# Altium PCB PowerPlane - 副本.PcbDoc
Units mm, origin at the board's own origin, x right, y up, seen from the top; angles counter-clockwise.
Board outline 140 x 96 mm, 2 copper layers (Top Layer, Bottom Layer); 114 components, 76 nets, 331 pads, 37 vias.
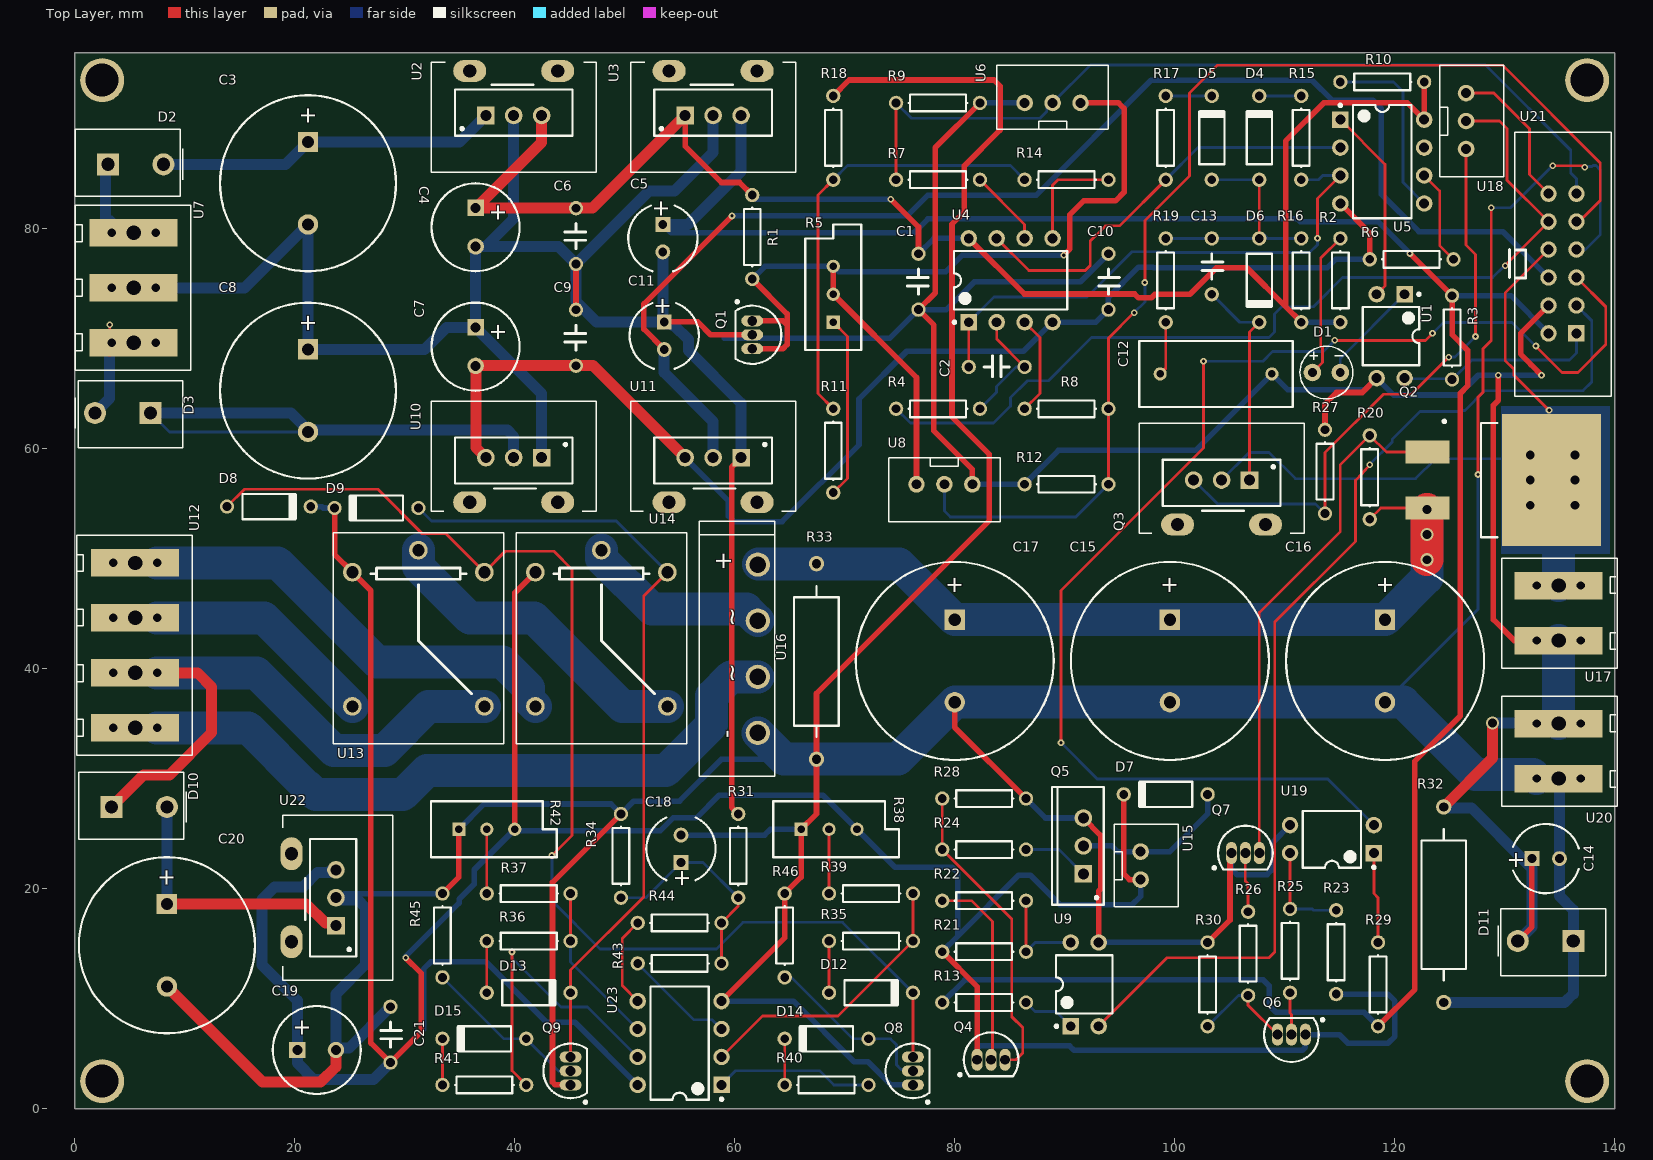
[diagram p0: Top Layer view]
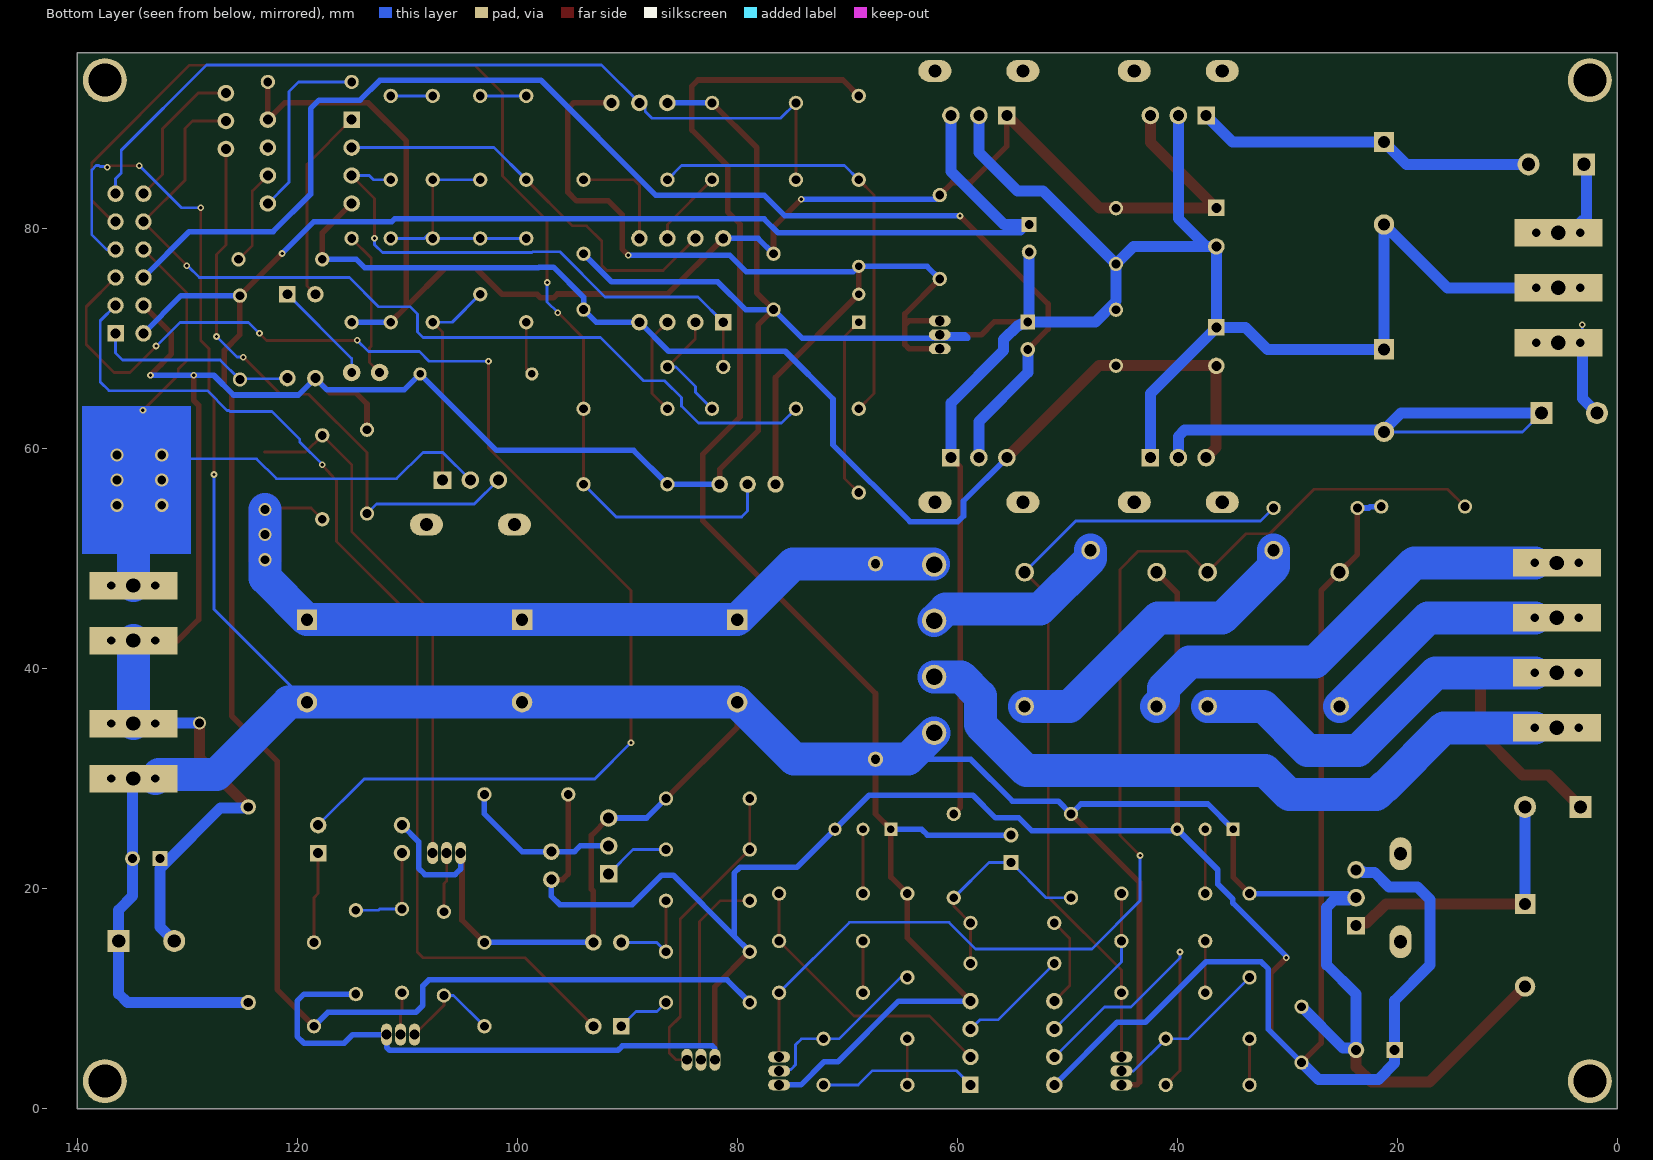
[diagram p1: Bottom Layer view, seen from below]

## Layer stack, top to bottom
Top Solder: solder mask 0.0102, Solder Resist, Dk 3.5
Top Layer: signal copper 0.0356
Dielectric 1: dielectric 0.32, FR-4, Dk 4.8
Bottom Layer: signal copper 0.0356
Bottom Solder: solder mask 0.0102, Solder Resist, Dk 3.5

## Board outline
0,0 0,96 140,96 140,0

## Design rules (kind name [scope] priority, off if disabled: settings)
Clearance Clearance_1 [WithinRoom('RoomDefinition1') or WithinRoom('RoomDefinition2') or  WithinRoom('RoomDefinition3') or  WithinRoom('RoomDefinition4') or  WithinRoom('RoomDefinition5') or  WithinRoom('RoomDefinition6') vs WithinRoom('RoomDefinition1') or WithinRoom('RoomDefinition2') or  WithinRoom('RoomDefinition3') or  WithinRoom('RoomDefinition4') or  WithinRoom('RoomDefinition5') or  WithinRoom('RoomDefinition6')] p1: gap=0.2 ignorepadtopadclearanceinfootprint=TRUE
Clearance [Not (  WithinRoom('RoomDefinition1') or WithinRoom('RoomDefinition2') or  WithinRoom('RoomDefinition3') or  WithinRoom('RoomDefinition4') or  WithinRoom('RoomDefinition5') or  WithinRoom('RoomDefinition6') ) vs Not (  WithinRoom('RoomDefinition1') or WithinRoom('RoomDefinition2') or  WithinRoom('RoomDefinition3') or  WithinRoom('RoomDefinition4') or  WithinRoom('RoomDefinition5') or  WithinRoom('RoomDefinition6') )] p2: gap=0.508 ignorepadtopadclearanceinfootprint=TRUE except(1.016: Track-Track)
ComponentClearance [All] p1: gap=0.254 collisioncheckmode=3 verticalgap=0.254 showdistances=FALSE checkcomponentboundary=TRUE
Height [All] p1: minheight=0 maxheight=50.4 prefheight=12.7
HoleSize [All] p1: absolutevalues=TRUE maxlimit=3 minlimit=0.025 maxpercent=80.000 minpercent=20.000
MinimumSolderMaskSliver MinimumSolderMaskSliver_2 [HasFootprint('TO-226-AA') vs HasFootprint('TO-226-AA')] p1: minsoldermaskwidth=0.06
MinimumSolderMaskSliver MinimumSolderMaskSliver_1 [HasFootprint('TO-92A') vs HasFootprint('TO-92A')] p2: minsoldermaskwidth=0.06
MinimumSolderMaskSliver [All] p3: minsoldermaskwidth=0.254
PolygonConnect [All] p1: connectstyle=Relief reliefconductorwidth=0.254 reliefentries=4 polygonreliefangle="90 Angle" airgapwidth=0.254
RoomDefinition RoomDefinition6 [False] p1: confinementstyle=ConfineIn formatcopy=TRUE lockcomponents=FALSE outline 107.588,6.731 ccw(c110.617,6.731) 110.617,3.702 ccw(c110.617,6.731) 113.646,6.731 ccw(c110.617,6.731) 110.617,9.76 ccw(c110.617,6.731)
RoomDefinition RoomDefinition5 [False] p2: confinementstyle=ConfineIn formatcopy=TRUE lockcomponents=FALSE outline 103.114,23.241 ccw(c106.426,23.241) 106.426,19.929 ccw(c106.426,23.241) 109.738,23.241 ccw(c106.426,23.241) 106.426,26.553 ccw(c106.426,23.241)
RoomDefinition RoomDefinition4 [False] p3: confinementstyle=ConfineIn formatcopy=TRUE lockcomponents=FALSE outline 79.629,4.445 ccw(c83.312,4.445) 83.312,0.762 ccw(c83.312,4.445) 86.995,4.445 ccw(c83.312,4.445) 83.312,8.128 ccw(c83.312,4.445)
RoomDefinition RoomDefinition3 [False] p4: confinementstyle=ConfineIn formatcopy=TRUE lockcomponents=FALSE outline 73.025,3.429 ccw(c76.2,3.429) 76.2,0.254 ccw(c76.2,3.429) 79.375,3.429 ccw(c76.2,3.429) 76.2,6.604 ccw(c76.2,3.429)
RoomDefinition RoomDefinition2 [False] p5: confinementstyle=ConfineIn formatcopy=TRUE lockcomponents=FALSE outline 41.547,3.429 ccw(c45.085,3.429) 45.085,-0.109 ccw(c45.085,3.429) 48.623,3.429 ccw(c45.085,3.429) 45.085,6.967 ccw(c45.085,3.429)
RoomDefinition RoomDefinition1 [False] p6: confinementstyle=ConfineIn formatcopy=TRUE lockcomponents=FALSE outline 61.595,66.761 cw(c61.595,70.358) 57.998,70.358 cw(c61.595,70.358) 61.595,73.955 cw(c61.595,70.358) 65.192,70.358 cw(c61.595,70.358)
RoutingVias [All] p1: holewidth=0.305 width=0.61 viastyle="Through Hole" minholewidth=0.305 minwidth=0.61 maxholewidth=1.2 maxwidth=0.85
SilkToSolderMaskClearance SilkToSolderMaskClearance_2 [HasFootprint('TO-226-AA') vs HasFootprint('TO-226-AA')] p1: minsilkscreentomaskgap=0.254 clearancetoexposedcopper=TRUE
SilkToSolderMaskClearance SilkToSolderMaskClearance_1 [HasFootprint('TO-92A') vs HasFootprint('TO-92A')] p2: minsilkscreentomaskgap=0.06 clearancetoexposedcopper=TRUE
SilkToSolderMaskClearance [IsPad] p3: minsilkscreentomaskgap=0.254 clearancetoexposedcopper=TRUE
SolderMaskExpansion [All] p1: expansion=0.102 istentingtop=FALSE
SupplyNets "Schematic Supply Nets_1" [InNet('GND')] p1: voltage=0.000
SupplyNets "Schematic Supply Nets" [InNet('+12')] p2: voltage=0.000
Width Width_1 [InNetClass('Power')] p1: maxlimit=3 minlimit=0.254 preferedwidth=0.508
Width [All] p2: maxlimit=3 minlimit=0.254 preferedwidth=0.254
25 further rules are at their usual default settings.

## Classes and differential pairs
net class Power: +2.5V_H +5V_H +12 +12V_H -5V_H -12V_H GND GND_H

## Components (designator, comment, footprint, x,y, rotation, side; value= is the part's Value field where it differs from the comment)
C1 "" RAD-0.2 76.708,75.184 r90 top value=104
C2 "BBC" RAD-0.2 83.82,67.437 r0 top value=471
C3 "35V" CAPPR7.5-16x25 21.209,84.137 r270 top value=3300uF
C4 "25V" CAPPR5-8x12 36.449,80.137 r270 top value=470uF
C5 "16V" CAPPR5-6.3x11 53.467,79.14 r270 top value=220uF
C6 "" RAD-0.2 45.571,79.329 r90 top value=104
C7 "25V" CAPPR5-8x12 36.449,69.278 r270 top value=470uF
C8 "35V" CAPPR7.5-16x25 21.209,65.278 r270 top value=3300uF
C9 "" RAD-0.2 45.571,70.086 r90 top value=104
C10 "" RAD-0.2 93.98,75.184 r270 top value=104
C11 "16V" CAPPR5-6.3x11 53.594,70.275 r270 top value=220uF
C12 "BBC" RAD-0.4-BBC 103.759,66.802 r0 top value=153
C13 "BBC" RAD-0.2 103.378,76.581 r270 top value=471
C14 "50V" CAPPR5-6.3x11 133.731,22.733 r0 top value=100uF
C15 "63V" CAPPR7.5-18x35.5 99.568,40.7 r270 top value=2200uF
C16 "63V" CAPPR7.5-18x35.5 119.126,40.7 r270 top value=2200uF
C17 "63V" CAPPR7.5-18x35.5 80.01,40.7 r270 top value=2200uF
C18 "50V" CAPPR5-6.3x15 55.118,23.622 r90 top value=47uF
C19 "25V" CAPPR5-8x12 21.999,5.334 r0 top value=470uF
C20 "35V" CAPPR7.5-16x25 8.382,14.859 r270 top value=3300uF
C21 "" RAD-0.2 28.702,6.731 r270 top value=104
D1 "CC" LED 113.792,66.929 r90 top
D2 "1N5408" DIO18.84-9.6x5.6-Vetical 5.016,85.852 r0 top
D3 "1N5408" DIO18.84-9.6x5.6-Vetical 4.889,63.246 r180 top
D4 "1N4007" DO-41 107.696,88.265 r90 top
D5 "1N4007" DO-41 103.378,88.265 r90 top
D6 "1N4007" DO-41 107.696,75.311 r270 top
D7 "1N4007" DO-41 99.187,28.575 r180 top
D8 "1N4007" DO-41 17.653,54.737 r0 top
D9 "1N4007" DO-41 27.432,54.61 r180 top
D10 "1N5408" DIO18.84-9.6x5.6-Vetical 5.334,27.432 r0 top
D11 "1N5408" DIO18.84-9.6x5.6-Vetical 134.239,15.24 r180 top
D12 "1N4007" DO-41 72.39,10.541 r0 top
D13 "1N4007" DO-41 41.275,10.541 r0 top
D14 "1N4728" DO-41 68.353,6.35 r180 top
D15 "1N4728" DO-41 37.238,6.35 r180 top
Q1 "TL431" TO-226-AA 61.595,70.358 r180 top
Q2 "F4905S" D2-PAK 130.739,57.15 r0 top
Q3 "TIP41" "TO-220AB - HEATSINK" 104.267,57.15 r180 top
Q4 "S8550" TO-92A 83.312,4.445 r270 top
Q5 "TIP41" TO-220AB 91.694,23.887 r90 top
Q6 "S8550" TO-92A 110.617,6.731 r90 top
Q7 "2N5551" TO-92A 106.426,23.241 r270 top
Q8 "S8050" TO-92A 76.2,3.429 r0 top
Q9 "S8050" TO-92A 45.085,3.429 r0 top
R1 "" AXIAL-0.3 61.595,79.248 r270 top value=2.7K
R2 "" AXIAL-0.3 115.062,75.311 r90 top value=2K
R3 "" AXIAL-0.3 125.222,70.104 r270 top value=10K
R4 "" AXIAL-0.3 78.486,63.627 r180 top value=100R
R5 "" VR5 68.961,74.041 r90 top value=5K
R6 "" AXIAL-0.3 121.539,77.216 r180 top value=10K
R7 "" AXIAL-0.3 78.486,84.455 r0 top value=100R
R8 "" AXIAL-0.3 90.17,63.627 r0 top value=100R
R9 "" AXIAL-0.3 78.486,91.44 r0 top value=1M
R10 "" AXIAL-0.3 118.872,93.345 r0 top value=10K
R11 "" AXIAL-0.3 68.961,59.817 r90 top value=6.8K
R12 "" AXIAL-0.3 90.17,56.769 r180 top value=1M
R13 "" AXIAL-0.3 82.677,9.652 r0 top value=1k
R14 "" AXIAL-0.3 90.17,84.455 r180 top value=100R
R15 "" AXIAL-0.3 111.506,88.265 r90 top value=100R
R16 "" AXIAL-0.3 111.506,75.311 r90 top value=3K
R17 "" AXIAL-0.3 99.187,88.265 r90 top value=100R
R18 "" AXIAL-0.3 68.961,88.265 r90 top value=100K
R19 "" AXIAL-0.3 99.187,75.311 r270 top value=33K
R20 "" AXIAL-0.3 117.729,57.404 r90 top value=10K
R21 "" AXIAL-0.3 82.677,14.273 r180 top value=10K
R22 "" AXIAL-0.3 82.677,18.909 r180 top value=4.7K
R23 "" AXIAL-0.3 114.681,14.224 r270 top value=10K
R24 "" AXIAL-0.3 82.677,23.558 r0 top value=2K
R25 "" AXIAL-0.3 110.49,14.351 r270 top value=4.7K
R26 "" AXIAL-0.3 106.68,14.097 r270 top value=2K
R27 "" AXIAL-0.3 113.665,57.912 r270 top value=1K
R28 "" AXIAL-0.3 82.677,28.194 r0 top value=10K
R29 "" AXIAL-0.3 118.491,11.303 r90 top value=1k
R30 "" AXIAL-0.3 102.997,11.303 r90 top value=10K
R31 "" AXIAL-0.3 60.325,22.987 r90 top value=10K
R32 "2W" AXIAL-0.7 124.46,18.542 r90 top value=4.3K
R33 "2W" AXIAL-0.7 67.437,40.66 r90 top value=4.3K
R34 "" AXIAL-0.3 49.657,22.987 r270 top value=10K
R35 "" AXIAL-0.3 72.39,15.24 r0 top value=56K
R36 "" AXIAL-0.3 41.275,15.24 r0 top value=100K
R37 "" AXIAL-0.3 41.275,19.558 r180 top value=10K
R38 "" VR5 68.58,25.4 r0 top value=10K
R39 "" AXIAL-0.3 72.39,19.558 r180 top value=10K
R40 "" AXIAL-0.3 68.353,2.159 r0 top value=2.7K
R41 "" AXIAL-0.3 37.238,2.159 r0 top value=2.7K
R42 "" VR5 37.465,25.4 r0 top value=10K
R43 "" AXIAL-0.3 54.991,13.208 r0 top value=100R
R44 "" AXIAL-0.3 54.991,16.891 r180 top value=100R
R45 "" AXIAL-0.3 33.428,15.748 r90 top value=10K
R46 "" AXIAL-0.3 64.543,15.748 r90 top value=10K
U1 "EL817C" PC817 120.904,74.041 r270 top
U2 "L7812" "TO-220AB - HEATSINK" 39.913,90.297 r0 top
U3 "L7805" "TO-220AB - HEATSINK" 58.039,90.297 r0 top
U4 "TL082" DIP-8 85.09,75.311 r90 top
U5 "LM393" DIP-8 118.872,86.106 r0 top
U6 "POT-3P" X254-3P 88.9,91.44 r180 top
U7 "POWER3" KF128-50-3P 5.363,74.629 r90 top
U8 "POT-3P" X254-3P 79.068,56.769 r0 top
U9 "EL817C" PC817 90.551,7.493 r90 top
U10 "L7912" "TO-220AB - HEATSINK" 39.913,59.182 r180 top
U11 "L7905" "TO-220AB - HEATSINK" 58.039,59.182 r180 top
U12 "POWER4" KF128-50-4P 5.493,42.118 r90 top
U13 "SDR12VDCSLC" SDR12VDCSLC 31.242,42.672 r0 top
U14 "SDR12VDCSLC" SDR12VDCSLC 47.879,42.672 r0 top
U15 "FAN" X254-2P 96.901,22.098 r90 top
U16 "KBU1010" KBU1010 62.103,34.163 r90 top
U17 "POWER2" KF128-50-2P 134.915,45.061 r270 top
U18 "REG3" X254-3P 126.492,89.789 r90 top
U19 "EL817C" PC817 118.11,23.241 r180 top
U20 "POWER2" KF128-50-2P 134.915,32.512 r270 top
U21 "DC3-12P" DC3-12P 136.532,70.485 r90 top
U22 "L7812" "TO-220AB - HEATSINK" 23.749,19.177 r90 top
U23 "LM358" DIP-8 54.991,5.969 r180 top

## Footprints (in the part's own frame and the unit in brackets; to place one, negate y for a bottom-side part, rotate by r counter-clockwise, add the part's x,y. Pads: shape width x height; smd on the part's side, far side on the other; paste and mask are expansions set on the pad)
AXIAL-0.3 [mm] "Axial Device, Thru-Hole; 2 Leads; 0.3 in Pin Spacing"
  round 1.3 hole 0.8: 1(-3.81,0) 2(3.81,0)
  silkscreen extent -2.67,-0.76 2.67,0.76, body extent -2.85,-1.16 2.85,1.14, height 2.45
AXIAL-0.7 [mm] "Axial Device, Thru-Hole; 2 Leads; 0.7 in Pin Spacing"
  round 1.4 hole 0.85: 1(-8.89,0) 2(8.89,0)
  silkscreen extent -6.86,-2.03 6.86,2.03, body extent -7.35,-2.41 7.35,2.39, height 4.9
CAPPR5-6.3x11 [mm] "Capacitor, Electrolytic, Radial; Body 6.3 x 11 mm (Dia.xH typ); Pin Spacing 5 mm (typ)"
  rect 1.35x1.35 hole 0.8: 1(-1.25,0)
  round 1.35 hole 0.8: 2(1.25,0)
  silkscreen extent -2.96,-3.15 3,3.15, body extent -3,-3 3,3, height 11
CAPPR5-6.3x15 [mm] "Capacitor, Electrolytic, Radial; Body 6.3 x 15 mm (Dia.xH typ); Pin Spacing 5 mm (typ)"
  rect 1.35x1.35 hole 0.8: 1(-1.25,0)
  round 1.35 hole 0.8: 2(1.25,0)
  silkscreen extent -2.85,-3.15 2.85,3.15, body extent -3,-3 3,3, height 13
CAPPR5-8x12 [mm] "Capacitor, Electrolytic, Radial; Body 8 x 12 mm (Dia.xH typ); Pin Spacing 5 mm (typ)"
  rect 1.5x1.5 hole 0.9: 1(-1.75,0)
  round 1.5 hole 0.9: 2(1.75,0)
  silkscreen extent -4,-4 4,4, body extent -4,-4 4,4, height 12
CAPPR7.5-16x25 [mm] "Capacitor, Electrolytic, Radial; Body 16 x 25 mm (Dia.xH typ); Pin Spacing 7.5 mm (typ)"
  rect 1.85x1.85 hole 1.1: 1(-3.75,0)
  round 1.85 hole 1.1: 2(3.75,0)
  silkscreen extent -8,-8 8,8, body extent -8,-8 8,8, height 25
CAPPR7.5-18x35.5 [mm] "Capacitor, Electrolytic, Radial; Body 18 x 35.5 mm (Dia.xH typ); Pin Spacing 7.5 mm (typ)"
  rect 1.85x1.85 hole 1.1: 1(-3.75,0)
  round 1.85 hole 1.1: 2(3.75,0)
  silkscreen extent -9,-9 9,9, body extent -9,-9 9,9, height 35.5
D2-PAK [mm] "D2-PAK, 4-Leads, Body 9.2x10.2mm, Pitch 2.54mm, Lead Span 15.4mm, IPC High Density"
  rect 4x2.1 smd: 1(-7.74,2.54) 3(-7.74,-2.54)
  rect 9x12 smd: 2(3.5,0)
  silkscreen extent -6.35,-5.2 -1.4,5.46, body extent -2.9,-5.2 6.5,5.2, height 4.6
DC3-12P [mm] "Connector; Header; 6x2 Position"
  rect 1.5x1.5 hole 0.9: 1(0,0)
  round 1.5 hole 0.9: 2(2.54,0) 3(5.08,0) 4(7.62,0) 5(10.16,0) 6(12.7,0) 7(12.7,2.54) 8(10.16,2.54) 9(7.62,2.54) 10(5.08,2.54) 11(2.54,2.54) 12(0,2.54)
  silkscreen extent -5.71,-3.18 18.29,6.1
DIO18.84-9.6x5.6-Vetical [mm] "Diode, Axial; Body 9.5 x 5.6 mm (LxDia. max), Lead Dia. 1.32 mm (max)"
  rect 2x2 hole 1.2: 1(-2,0)
  round 2 hole 1.2: 2(3.048,0)
  silkscreen extent -4.95,-2.92 4.83,3.17, body extent -4.9,-2.95 1.09,3.05, height 10
DIP-8 [mm] "DIP; 8 Leads; Row Spacing 7.62 mm; Pitch 2.54 mm"
  rect 1.5x1.5 hole 0.9: 1(-3.81,3.81)
  round 1.5 hole 0.9: 2(-3.81,1.27) 3(-3.81,-1.27) 4(-3.81,-3.81) 5(3.81,-3.81) 6(3.81,-1.27) 7(3.81,1.27) 8(3.81,3.81)
  silkscreen extent -3.93,-5.15 2.65,5.23, body extent -3.6,-5.15 3.6,5.15, height 5.08
DO-41 [mm] "Diode, Axial; Body 5.2 x 2.7 mm (LxDia. max), Lead Dia. 0.86 mm (max)"
  round 1.3 hole 0.8: 1(-3.81,0) 2(3.81,0)
  silkscreen extent -2.41,-1.14 2.54,1.14, body extent -2.46,-1.23 2.54,1.27, height 2.55
KBU1010 [mm]
  round 2.2 hole 1.5: 1(0,0) 2(5.1,0) 3(10.2,0) 4(15.3,0)
  silkscreen extent -3.95,-1.52 19.25,5.33, body extent -3.94,-1.52 19.18,5.33, height 19.3
KF128-50-2P [mm] "KF128-50-2P"
  round 1.524 hole 0.762 mask+0: 1(-2.5,2) 1(-2.5,-2) 2(2.5,2) 2(2.5,-2)
  rect 2.5x8 hole 1.3: 1(-2.5,0) 2(2.5,0)
  silkscreen extent -5,-5.2 5,5.3, body extent -4.95,-5.21 4.95,5.33, height 14
KF128-50-3P [mm] "KF128-50-3P"
  round 1.524 hole 0.762 mask+0: 1(5,-2) 1(5,2) 2(0,2) 2(0,-2) 3(-5,-2) 3(-5,2)
  rect 2.5x8 hole 1.3: 1(5,0) 2(0,0) 3(-5,0)
  silkscreen extent -7.5,-5.2 7.5,5.3, body extent -7.49,-5.21 7.49,5.33, height 7
KF128-50-4P [mm] "KF128-50-4P"
  round 1.524 hole 0.762 mask+0: 1(7.5,-2) 1(7.5,2) 2(2.5,-2) 2(2.5,2) 3(-2.5,-2) 3(-2.5,2) 4(-7.5,-2) 4(-7.5,2)
  rect 2.5x8 hole 1.3: 1(7.5,0) 2(2.5,0) 3(-2.5,0) 4(-7.5,0)
  silkscreen extent -10,-5.2 10,5.3, body extent -10.03,-5.21 10.03,5.33, height 7
LED [mm] "LED; 2 Leads"
  round 1.6 hole 0.8: 1(0,1.27) 2(0,-1.27)
  silkscreen extent -2.4,-2.4 2.4,2.4
PC817 [mm] "PC817"
  rect 1.5x1.5 hole 0.9: 1(0,0)
  round 1.5 hole 0.9: 2(0,-2.54) 3(7.62,-2.54) 4(7.62,0)
  silkscreen extent -0.12,-3.81 6.46,1.43, body extent 0.21,-3.81 7.41,1.34, height 5.08
RAD-0.2 [mm] "Radial Cap, Thru-Hole; 2 Leads; 0.2 in Pin Spacing"
  round 1.3 hole 0.8: 1(-2.54,0) 2(2.54,0)
  silkscreen extent -1.14,-0.89 1.14,1.02, body extent -2.54,-1.91 2.54,2.03, height 6
RAD-0.4-BBC [mm] "Radial Cap, Thru-Hole; 2 Leads; 0.4 in Pin Spacing"
  round 1.2 hole 0.7: 1(-5.08,0) 2(5.08,0)
  silkscreen extent -6.98,-3 6.98,3
SDR12VDCSLC [mm] "SDR12VDCSLC"
  round 1.7 hole 1.1: 1(-6,6.1) 2(0,8.1) 3(6,6.1) 4(6,-6.1) 5(-6,-6.1)
  silkscreen extent -7.75,-9.5 7.75,9.7, body extent -7.75,-9.53 7.75,9.65, height 15.8
TO-92A [mm] "TO, Flat Index; 3 In-Line, Axial Leads; Body Dia. 4.5mm; Leads 0.51 x 0.48 mm (max)"
  oval 2x1 hole 0.9: 1(0,1.27) 2(0,0) 3(0,-1.27)
  silkscreen extent -2.48,-2.95 1.5,2.48, body extent -2.48,-2.5 1.5,2.5, height 6.86
TO-220AB [mm] "TO, Thru-Hole, Vertical, Heatsink Mounted; 3 In-Line Leads; Pitch 2.54 mm"
  rect 1.6x1.6 hole 1: 1(-2.54,0)
  round 1.6 hole 1: 2(0,0) 3(2.54,0)
  silkscreen extent -5.35,-1.85 5.35,2.85, body extent -5.4,-1.9 5.4,2.9, height 19.3
"TO-220AB - HEATSINK" [mm] "TO, Thru-Hole, Vertical, Heatsink Mounted; 3 In-Line Leads; Pitch 2.54 mm, with heat sink."
  oval 3x2 hole 1.2: 0(-4,4.05) 0(4,4.05)
  rect 1.6x1.6 hole 1: 1(-2.54,0)
  round 1.6 hole 1: 2(0,0) 3(2.54,0)
  silkscreen extent -7.5,-5.15 7.5,4.85, body extent -7.49,-5.08 7.49,4.83, height 20
TO-226-AA [mm] "TO, Flat Index; 3 In-Line, Axial Leads; Body Dia. 4.8mm; Leads 0.55 x 0.51 mm (max)"
  oval 2x1 hole 0.9: 1(0,-1.27) 2(0,0) 3(0,1.27)
  silkscreen extent -2.65,-3.13 1.52,2.65, body extent -2.65,-2.66 1.52,2.66, height 5.33
VR5 [mm] "Thru-Hole; 3 Leads"
  round 1.2 hole 0.7: 1(2.54,0) 3(0,0)
  rect 1.2x1.2 hole 0.7: 2(-2.54,0)
  silkscreen extent -5.08,-2.54 6.35,2.54, body extent -4.95,-2.29 4.95,2.29, height 10
X254-2P [mm] "X254-2P"
  oval 1.5x1.524 hole 0.9: 1(-1.27,0) 2(1.27,0)
  silkscreen extent -3.75,-3.43 3.75,2.41, body extent -3.68,-3.43 3.68,2.29, height 7
X254-3P [mm] "X254-3P"
  oval 1.5x1.524 hole 0.9: 1(-2.54,0) 2(0,0) 3(2.54,0)
  silkscreen extent -5.08,-3.43 5.08,2.41, body extent -5.08,-3.43 5.08,2.29, height 7

## Part data
C1 C2 C6 C9 C10 C12 C13 C21: library part Cap, "Capacitor", LatestRevisionDate=17-Jul-2002, LatestRevisionNote="Re-released for DXP Platform.", PackageDescription="Radial Cap, Thru-Hole; 2 Leads; 0.3 in Pin Spacing", PackageReference=RAD-0.3, Published=8-Jun-2000, Publisher="Altium Limited"
C3: library part "Cap Pol1", "Polarized Capacitor (Radial),16x25", LatestRevisionDate=17-Jul-2002, LatestRevisionNote="Re-released for DXP Platform.", PackageDescription="Polarized Capacitor (Radial); 2 Leads", PackageReference=RB7.6-15, Published=8-Jun-2000, Publisher="Altium Limited"
C4 C5 C7 C8 C11 C14 C15 C16 C17 C18 C19 C20: library part "Cap Pol1", "Polarized Capacitor (Radial)", LatestRevisionDate=17-Jul-2002, LatestRevisionNote="Re-released for DXP Platform.", PackageDescription="Polarized Capacitor (Radial); 2 Leads", PackageReference=RB7.6-15, Published=8-Jun-2000, Publisher="Altium Limited"
D1: library part LED1, "Typical RED GaAs LED", LatestRevisionDate=08-Jul-2005, LatestRevisionNote="Mech Layer 1 removed.", PackageDescription="LED; 2 Leads", PackageReference=LED-1, Published=8-Jun-2000, Publisher="Altium Limited"
D2 D3 D4 D5 D6 D7 D8 D9 D10 D11 D12 D13: library part "Diode 1N4007", "1 Amp General Purpose Rectifier", Code_JEDEC=DO-204-AL, ComponentLink1Description="Manufacturer Link", ComponentLink1URL=http://www.fairchildsemi.com/, ComponentLink2Description=Datasheet, ComponentLink2URL=http://www.fairchildsemi.com/ds/1N%2F1N4001.pdf, DatasheetVersion=1998, LatestRevisionDate=17-Jul-2002, LatestRevisionNote="Re-released for DXP Platform.", PackageDescription="Diode, Axial; Body 5.2 x 2.7 mm (LxDia. max), Lead Dia. 0.86 mm (max)", PackageReference=DO-41, PackageVersion=Aug-1999, Published=8-Jun-2000, Publisher="Altium Limited"
D14 D15: library part "D Zener", "Zener Diode", LatestRevisionDate=17-Jul-2002, LatestRevisionNote="Re-released for DXP Platform.", PackageDescription="Diode, Thru-Hole; 2 Leads; 0.7 in Pin Spacing", PackageReference=DIODE-0.7, Published=8-Jun-2000, Publisher="Altium Limited"
Q2: library part PMOS-2, "P-Channel Power MOSFET", ComponentLink1Description="Manufacturer Link", ComponentLink1URL=http://www.irf.com/, DatasheetVersion=PD-9.390D, LatestRevisionDate=17-Jul-2002, LatestRevisionNote="Re-released for DXP Platform.", Note="Pin 4 not drawn and electrically connected to Pin 2.", PackageDescription="TO, Thru-Hole, Vertical, Heatsink Mounted; 3 In-Line Leads; Pitch 2.54 mm", PackageReference=TO-220AB, PackageVersion=Feb-1997, Published=8-Jun-2000, Publisher="Altium Limited"
Q3 Q5 Q7 Q8 Q9: library part NPN, "NPN Bipolar Transistor", Code_JEDEC=TO-226-AA, LatestRevisionDate=17-Jul-2002, LatestRevisionNote="Re-released for DXP Platform.", PackageDescription="TO, Flat Index; 3 In-Line, Axial Leads; Body Dia. 4.8mm; Leads 0.55 x 0.51 mm (max)", PackageReference=TO-226-AA, Published=8-Jun-2000, Publisher="Altium Limited"
Q4 Q6: library part PNP, "PNP Bipolar Transistor", LatestRevisionDate=29-May-2009, LatestRevisionNote="IPC-7351 Footprint Added.", PackageDescription="3-Pin SOT-23 Package 0.95 mm Pitch, 2.4 mm Lead Span", PackageReference=SOT-23B, PackageVersion=Aug-1999, Published=8-Jun-2000, Publisher="Altium Limited"
R1 R2 R3 R4 R6 R7 R8 R9 R10 R11 R12 R13 R14 R15 R16 R17 R18 R19 R20 R21 R22 R23 R24 R25 R26 R27 R28 R29 R30 R31 R32 R33 R34 R35 R36 R37 R39 R40 R41 R43 R44 R45 R46: library part Res1, "Resistor", LatestRevisionDate=17-Jul-2002, LatestRevisionNote="Re-released for DXP Platform.", PackageDescription="Axial Device, Thru-Hole; 2 Leads; 0.3 in Pin Spacing", PackageReference=AXIAL-0.3, Published=8-Jun-2000, Publisher="Altium Limited"
R5 R38 R42: library part RPot, "Potentiometer", LatestRevisionDate=17-Jul-2002, LatestRevisionNote="Re-released for DXP Platform.", PackageDescription="Variable Resistor, Thru-Hole; 3 Leads", PackageReference=VR5, Published=8-Jun-2000, Publisher="Altium Limited", Set Position=0.5, Sim Note="Enter the Resistance value and the set point into parameter fields."
U7 U12: "Power Connector 3"
U18: "REG2"

## Free pads (board coordinates)
  round 4 hole 3: 0(2.5,2.5) 0(2.5,93.5) 0(137.5,2.5) 0(137.5,93.5)

## Via types
v1: diameter 0.61, hole 0.305, Top Layer to Bottom Layer, 27 vias
v2: diameter 1.2, hole 0.8, Top Layer to Bottom Layer, 10 vias

## Nets (pads, with @x,y where several pads share a name; then routed paths per layer and width w, separated by ;. In a path a pad name is that pad's centre, name@x,y a point inside that pad or via, vN(x,y) a via of type N, cw(c..) or ccw(c..) an arc to the next point about the centre after c; other vN are vias at no path point)
+2.5V_H: Q1.1 Q1.3 R1.2 R5.1 R5.3 U6.1 U8.1 | length 88
  Top Layer w0.508: Q1.3 64.389,69.088 64.77,69.469 64.77,71.247 ; Q1.1 64.389,71.628 64.77,71.247 ; R1.2 64.77,72.263 64.77,71.247 ; R5.1 R5.3 76.528,66.474 U8.1 ; v1(89.916,77.597) 90.475,78.156 90.475,81.28 91.719,82.525 94.615,82.525 95.402,83.312 95.402,90.932 94.894,91.44 U6.1
  Bottom Layer w0.508: R1.2 62.738,76.581 R5.1 69.469,76.073 79.172,76.073 80.696,77.597 v1(89.916,77.597)
+5V_H: C5.1 R3.1 R13.1 R29.1 U3.3 U21.12 | length 213.5
  Top Layer w0.508: R29.1 121.844,10.846 121.844,31.598 125.959,35.713 125.959,65.034 126.634,65.709 126.634,68.953 125.222,70.365 R3.1 v1(121.387,77.749)
  Bottom Layer w0.508: C5.1 54.228,79.629 76.298,79.629 77.568,80.899 111.15,80.899 111.404,80.645 118.491,80.645 v1(121.387,77.749) ; R13.1 80.924,11.709 108.052,11.709 108.585,11.176 108.585,9.398 109.22,8.763 117.221,8.763 R29.1 ; R3.1 130.563,73.914 U21.12
  Bottom Layer w1: C5.1 55.752,80.39 60.579,85.217 U3.3
+12: C19.1 C21.2 D7.2 D8.2 D9.2 Q4.3 Q6.3 R21.2 R23.2 R38.1 R42.1 U13.1 U14.1 U15.1 U22.3 U23.8 | length 318.1
  Top Layer w0.508: D9.2 23.622,50.392 U13.1 26.924,47.09 26.924,5.969 C21.2 31.496,6.985 31.496,12.319 v1(30.099,13.716) ; R42.1 40.005,46.898 U14.1 ; R21.2 82.042,11.098 Q4.3 ; D7.2 95.377,21.336 95.885,20.828 U15.1
  Bottom Layer w0.508: D8.2 22.479,54.737 22.606,54.61 D9.2 ; C21.2 31.725,7.214 31.725,12.7 32.385,13.36 37.389,13.36 42.89,7.859 45.481,7.859 U23.8 ; v1@30.035,13.779 34.952,18.696 34.952,19.042 36.322,20.412 36.322,21.717 R42.1 40.005,25.273 53.238,25.273 54.405,26.44 56.527,26.44 58.599,28.511 68.008,28.511 R38.1 74.574,21.946 79.756,21.946 80.289,21.412 80.289,15.696 ; R21.2 80.289,15.696 ; Q4.3 82.042,5.461 82.296,5.715 90.449,5.715 90.856,5.309 111.608,5.309 111.887,5.588 Q6.3 114.96,6.731 115.748,5.944 119.38,5.944 120.015,6.579 120.015,9.779 119.38,10.414 R23.2 ; U15.1 96.901,19.304 96.139,18.542 89.56,18.542 86.868,21.234 85.828,21.234 80.289,15.696
  Bottom Layer w1: U22.3 23.634,21.602 23.21,21.602 23.101,21.493 22.073,21.493 20.741,20.161 18.181,20.161 17.018,18.998 17.018,13.045 20.249,9.814 C19.1 20.249,4.135 21.717,2.667 27.178,2.667 C21.2
+12V_H: C1.2 C4.1 C6.2 R1.1 R2.1 R10.2 R16.1 U2.3 U3.1 U4.8 U5.8 | length 140.4
  Top Layer w0.508: U3.1 55.499,87.503 58.801,84.201 60.452,84.201 R1.1 ; v1(74.181,82.689) 76.708,80.162 C1.2 ; U4.8 86.339,74.062 96.361,74.062 96.712,73.711 97.87,73.711 98.2,74.041 101.381,74.041 103.794,76.454 106.553,76.454 110.084,72.923 ; R16.1 110.084,72.923 ; R10.2 U5.8 121.158,91.44 113.55,91.44 110.084,87.974 110.084,72.923
  Top Layer w1: U2.3 42.452,87.854 36.736,82.137 36.699,82.137 36.467,81.905 36.467,81.869 C6.2 47.071,81.869 U3.1
  Bottom Layer w0.508: R1.1 61.964,82.689 v1(74.181,82.689) ; C1.2 78.105,79.121 U4.8 ; R16.1 R2.1
-5V_H: C11.2 U11.2 U21.10 | length 119.3
  Top Layer w0.508: C11.2 51.74,70.879 51.74,73.152 v1(59.753,81.165)
  Bottom Layer w0.508: v1(59.753,81.165) 75.679,81.165 77.546,83.033 87.401,83.033 97.866,93.497 112.497,93.497 114.3,91.694 118.034,91.694 118.796,90.932 118.796,83.134 122.199,79.731 129.826,79.731 U21.10
  Bottom Layer w1: C11.2 53.594,66.929 58.039,62.484 U11.2
-12V_H: C7.2 C9.1 C10.2 R6.2 U4.4 U5.4 U10.3 U11.3 | length 115.9
  Top Layer w0.508: U5.4 117.729,79.629 R6.2
  Top Layer w1: U10.3 36.467,60.087 36.467,67.546 C9.1 47.135,67.546 U11.3
  Bottom Layer w0.508: U11.3 59.436,55.245 59.436,53.873 59.944,53.365 64.313,53.365 71.298,60.35 71.298,64.516 75.641,68.859 86.258,68.859 U4.4 92.837,71.501 C10.2 93.98,73.773 96.712,76.505 98.01,76.505 98.076,76.439 113.856,76.439 114.633,77.216 R6.2
CC: R3.2 U1.4 U21.1 | length 18.5
  Bottom Layer w0.254: U1.4 120.968,66.358 125.158,66.358 R3.2 125.24,66.294 127.018,68.072 135.89,68.072 136.532,68.714 U21.1
FAN: U9.2 U21.2 | length 97.7
  Top Layer w0.254: U9.2 99.314,13.716 108.585,13.716 109.093,14.224 109.093,44.221 116.434,51.562 116.434,57.125 117.094,57.785 117.094,57.838 117.729,58.473 v1(117.729,58.547)
  Bottom Layer w0.254: v1(117.729,58.547) 119.774,60.592 119.774,60.846 122.301,63.373 126.111,63.373 126.223,63.485 126.386,63.485 128.179,65.278 137.138,65.278 137.922,66.062 137.922,71.635 U21.2
FAN_L: R21.1 R22.1 U9.4 | length 9
  Top Layer w0.254: R21.1 R22.1
  Bottom Layer w0.254: R21.1 87.327,15.113 U9.4
FED_C: R8.2 R12.1 U8.2 U21.5 | length 105.9
  Top Layer w0.254: R12.1 R8.2 93.98,70.039 v1(96.313,72.372) ; v1(97.291,75.108) 97.291,80.742 101.346,84.797 101.346,92.329 103.886,94.869 129.794,94.869 138.693,85.97 138.693,82.559 136.779,80.645 U21.5
  Bottom Layer w0.254: U8.2 79.068,54.333 79.604,53.797 91.008,53.797 R12.1 ; v1(96.313,72.372) 97.291,73.35 v1(97.291,75.108)
FED_V: R7.1 R9.1 U6.2 U21.6 | length 78.8
  Top Layer w0.254: R7.1 R9.1
  Bottom Layer w0.254: R9.1 76.073,90.043 87.757,90.043 88.367,90.653 88.367,91.44 U6.2 88.9,91.452 92.342,94.894 128.245,94.894 136.008,87.131 136.008,85.063 136.532,84.539 U21.6
GND: C14.2 C15.2 C16.2 C17.2 C18.2 C19.2 C20.2 C21.1 D11.1 Q5.3 Q7.3 Q8.3 Q9.3 R18.2 R28.2 R30.2 R32.1 R33.1 R34.1 R38.2 R42.2 R45.2 R46.2 U9.3 U16.1 U19.3 U20.2 U21.4 U22.2 U23.4 | length 507.9
  Top Layer w0.254: v1(127.58,57.658) 127.574,57.664 127.574,64.673 128.031,65.13 128.031,69.085 128.778,69.832 v1(128.778,81.915) ; v1(134.366,85.725) 137.046,85.725 137.182,85.589 v1(137.278,85.589)
  Top Layer w0.508: R45.2 34.925,21.055 R42.2 ; Q9.3 43.688,2.159 43.434,2.413 43.434,20.574 R34.1 ; U23.4 64.543,15.521 R46.2 66.04,21.055 R38.2 67.437,26.797 R33.1 67.437,37.744 83.134,53.442 83.134,59.512 79.756,62.89 79.756,80.416 80.884,81.544 80.884,85.725 84.135,88.976 84.135,92.964 83.576,93.523 70.409,93.523 R18.2 ; C17.2 80.01,34.671 R28.2 ; Q5.3 93.269,24.852 93.269,19.964 93.091,19.787 U9.3 ; R30.2 105.029,17.145 105.029,23.241 Q7.3 ; U20.2@134.915,30.012 U20.2@134.981,29.946
  Top Layer w1: C20.2 17.078,2.413 22.352,2.413 23.749,3.81 C19.2
  Bottom Layer w0.254: C16.2 127.58,45.404 v1(127.58,57.658) ; v1(128.778,81.915) 130.556,81.915 v1(134.366,85.725) ; U21.4 137.345,78.105 138.684,79.444 138.684,85.344 138.294,85.734 138.027,85.734 137.95,85.657 137.346,85.657 v1(137.278,85.589)
  Bottom Layer w0.508: C19.2 C19.2@23.939,5.524 ; U22.2 23.945,18.981 23.958,18.968 24.548,19.558 R45.2 ; R42.2 37.223,27.698 48.756,27.698 R34.1 50.824,27.964 54.99,27.964 58.796,31.77 64.496,31.77 ; C18.2 62.718,24.872 63.246,25.4 R38.2 ; U23.4 65.334,9.779 70.846,4.267 72.109,4.267 74.217,2.159 Q8.3 ; R28.2 88.254,26.427 Q5.3 ; U9.3 R30.2 ; Q7.3 105.156,21.793 105.664,21.285 108.407,21.285 108.966,21.844 108.966,24.257 U19.3 ; U20.2@132.915,30.012 134.915,30.012 U20.2@136.915,30.012
  Bottom Layer w1: C19.2 23.749,10.414 26.416,13.081 26.416,18.288 25.736,18.968 24.382,18.968 24.288,19.062 24.026,19.062 U22.2@23.945,18.981 ; C19.2@23.939,5.524 24.955,5.524 C21.1 ; R32.1 135.445,9.652 136.239,10.446 D11.1 136.239,18.066 134.981,19.324 C14.2 U20.2@134.981,29.946
  Bottom Layer w3: U16.1 64.496,31.77 R33.1 74.83,31.77 C17.2 C15.2 C16.2 120.784,36.95 127.363,30.371 132.556,30.371 U20.2@132.915,30.012
GND_H: C1.1 C3.2 C4.2 C5.2 C6.1 C7.1 C8.1 C9.2 C10.1 C11.1 C12.2 C14.1 D11.2 Q1.2 R9.2 R12.2 R27.1 R31.2 R32.2 U1.3 U2.2 U3.2 U6.3 U7.2 U8.3 U10.1 U11.1 U17.2 U20.1 U21.11 | length 435.9
  Top Layer w0.508: C9.2 C6.1 ; C11.1 56.648,71.525 57.814,70.358 Q1.2 ; R31.2 59.715,27.407 59.715,58.318 U11.1 ; U8.3 81.608,58.117 78.103,61.622 78.103,71.249 C1.1 78.232,74.168 78.232,87.376 R9.2 ; R27.1 113.665,64.061 114.714,65.11 117.053,65.11 U1.3 ; v1(129.428,66.675) 129.428,64.404 128.977,63.953 128.977,44.454 130.87,42.562 132.915,42.562 U17.2@134.915,42.562 ; D11.2 132.481,16.53 C14.1 ; v1(133.35,66.675) 132.381,67.644 132.381,67.673 131.445,68.609 131.445,70.478 U21.11 ; U20.1@134.875,35.052 U20.1@134.915,35.012
  Top Layer w1: R32.2 128.905,31.877 v2(128.905,35.052)
  Bottom Layer w0.508: U7.2@3.364,74.629 5.364,74.629 U7.2@7.364,74.629 ; Q1.2 59.309,70.358 59.055,70.104 59.055,70.028 74.092,70.028 C1.1 79.248,72.644 81.785,75.181 91.437,75.181 C10.1 ; U8.3 R12.2 89.433,59.842 101.879,59.842 C12.2 110.287,65.354 117.297,65.354 U1.3 119.903,64.882 125.807,64.882 127.6,66.675 v1@129.475,66.675 ; R9.2 U6.3 ; v1@129.568,66.675 v1(133.35,66.675) ; U20.1@132.915,35.012 134.915,35.012 U20.1@136.915,35.012 ; U17.2@132.915,42.562 134.915,42.562 U17.2@136.915,42.562
  Bottom Layer w1: U7.2@7.364,74.629 15.451,74.629 C3.2 C8.1 31.817,69.028 33.817,71.028 C7.1 ; U2.2 39.912,80.933 37.366,78.387 ; U10.1 42.452,65.025 C7.1 ; C5.2 C11.1@53.467,71.525 ; U3.2 58.015,90.273 58.015,86.921 54.532,83.439 52.221,83.439 C6.1 ; U11.1 60.579,64.135 55.785,68.929 55.785,69.932 54.502,71.216 54.355,71.216 54.221,71.35 53.769,71.35 C11.1 C11.1@53.467,71.525 ; R32.2 124.537,27.355 126.97,27.355 132.037,22.288 132.481,21.844 132.481,16.53 D11.2 ; v2(128.905,35.052) U20.1@134.875,35.052 ; C7.1 C4.2 37.366,78.387 ; 37.366,78.387 43.973,78.387 C6.1 ; C6.1 45.571,73.406 47.452,71.525 C11.1@53.467,71.525
  Bottom Layer w3: U20.1@134.915,35.012 U17.2@134.915,42.562
NetC2_2: C2.2 R4.1 U4.2 | length 11.1
  Top Layer w0.254: U4.2 83.82,69.977 C2.2
  Bottom Layer w0.254: R4.1 83.805,65.136 83.805,65.659 85.583,67.437 C2.2
NetC3_1: C3.1 D2.2 U2.1 | length 31.1
  Bottom Layer w1: D2.2 19.174,85.852 C3.1 34.962,87.887 U2.1
NetC8_2: C8.2 D3.1 U10.2 | length 50.9
  Bottom Layer w0.254: D3.1 8.608,61.528 C8.2
  Bottom Layer w1: D3.1 19.651,63.246 21.209,61.688 39.327,61.688 39.912,61.102 U10.2
NetC12_1: C12.1 R19.2 | length 4.9
  Top Layer w0.254: C12.1 99.187,67.31 R19.2
NetC13_1: C13.1 D4.1 D5.1 D6.1 R16.2 R19.1 | length 22.3
  Top Layer w0.254: D6.1 D4.1
  Bottom Layer w0.254: R19.1 C13.1 D6.1 108.077,79.502 108.458,79.121 R16.2 ; D5.1 D4.1
NetC13_2: C13.2 D6.2 Q3.1 | length 20.1
  Top Layer w0.254: Q3.1 106.807,70.612 D6.2
  Bottom Layer w0.254: C13.2 105.918,71.501 D6.2
NetC15_1: C15.1 C16.1 C17.1 Q2.3 R20.1 R33.2 U16.4 | length 86.4
  Top Layer w0.254: R20.1 118.745,54.61 Q2.3
  Top Layer w3: v2(122.936,49.911) v2(122.936,54.483)
  Bottom Layer w0.254: U16.4 64.719,49.463 64.806,49.55 R33.2
  Bottom Layer w0.508: U16.4 U16.4@62.146,49.506
  Bottom Layer w3: U16.4@62.146,49.506 74.954,49.506 C17.1 C15.1 C16.1 122.936,48.26 v2(122.936,54.483)
  other v2: 122.936,52.197
NetC18_1: C18.1 R31.1 R34.2 R43.2 R44.1 | length 19.9
  Top Layer w0.254: R43.2 R44.1 60.325,18.415 R31.1
  Bottom Layer w0.254: R34.2 51.923,19.177 C18.1 57.13,22.372 R31.1
NetC20_1: C20.1 D10.2 U22.1 | length 25
  Top Layer w1: C20.1 21.042,18.609 22.79,16.861 23.525,16.861 U22.1
  Bottom Layer w1: C20.1 D10.2
NetD1_1: D1.1 R2.2 | length 13.4
  Top Layer w0.254: D1.1 113.436,67.843 113.436,69.172 113.284,69.324 113.284,77.343 R2.2
NetD1_2: D1.2 U1.1 | length 9.5
  Bottom Layer w0.254: D1.2 115.062,68.199 U1.1
NetD2_1: D2.1 U7.1 | length 12.6
  Top Layer w1: U7.1@2.794,80.34 3.364,79.771 U7.1@3.364,79.629
  Bottom Layer w0.254: U7.1@3.364,79.629 3.364,81.066 4.801,79.629 5.364,79.629 U7.1@7.364,79.629
  Bottom Layer w1: U7.1@2.794,80.34 2.794,85.629 D2.1
NetD3_2: D3.2 U7.3 | length 21.9
  Top Layer w0.254: U7.3@3.175,68.633 v1(3.175,71.272)
  Top Layer w0.508: U7.3@3.175,68.633 3.767,69.225 4.171,69.629 U7.3@5.364,69.629
  Bottom Layer w0.254: 3.175,64.579 3.175,68.633 v1(3.175,71.272) ; U7.3@3.364,69.629 5.364,69.629 U7.3@7.364,69.629
  Bottom Layer w1: D3.2 3.175,64.579 U7.3@3.175,68.633
NetD4_2: D4.2 R15.2 | length 4.1
  Bottom Layer w0.254: D4.2 108.026,91.745 108.356,92.075 R15.2
NetD5_2: D5.2 R17.2 | length 4.2
  Bottom Layer w0.254: R17.2 D5.2
NetD7_1: D7.1 Q5.2 U15.2 | length 14.7
  Bottom Layer w0.508: Q5.2 94.285,23.887 94.804,23.368 U15.2 99.568,23.368 102.997,26.797 D7.1
NetD10_1: D10.1 U12.3 U13.4 | length 59.9
  Top Layer w1: D10.1 6.238,30.336 8.605,30.336 12.446,34.177 12.446,38.354 11.182,39.618 U12.3@7.493,39.618
  Bottom Layer w0.254: U12.3@3.493,39.618 5.493,39.618 U12.3@7.493,39.618
  Bottom Layer w3: U12.3@7.493,39.618 16.517,39.618 23.579,32.556 28.147,32.556 32.163,36.572 U13.4
NetD12_1: D12.1 R35.1 | length 4.7
  Top Layer w0.254: D12.1 R35.1
NetD13_1: D13.1 R36.1 | length 4.7
  Top Layer w0.254: D13.1 R36.1
NetD14_1: D14.1 Q8.2 R46.1 | length 16.3
  Bottom Layer w0.254: R46.1 65.151,11.938 70.739,6.35 D14.1 74.168,6.35 74.701,5.817 74.701,3.988 75.133,3.556 76.2,3.556 Q8.2
NetD14_2: D14.2 R40.1 | length 4.2
  Top Layer w0.254: R40.1 D14.2
NetD15_1: D15.1 Q9.2 R45.1 | length 15.2
  Bottom Layer w0.254: R45.1 39.016,6.35 D15.1 43.969,3.429 Q9.2
NetD15_2: D15.2 R41.1 | length 4.2
  Top Layer w0.254: R41.1 D15.2
NetQ2_1: Q2.1 Q7.1 R20.2 | length 48
  Top Layer w0.254: Q7.1 107.696,45.11 115.062,52.476 115.062,58.547 R20.2 119.253,59.69 Q2.1
NetQ4_1: Q4.1 R24.1 R28.1 | length 28
  Top Layer w0.254: R28.1 R24.1 85.192,17.234 85.192,8.357 86.195,7.353 86.195,5.08 85.56,4.445 Q4.1
NetQ4_2: Q4.2 R22.2 | length 18
  Top Layer w0.254: R22.2 81.534,18.909 83.439,17.004 83.439,4.445 Q4.2
NetQ5_1: Q5.1 R24.2 | length 6.1
  Bottom Layer w0.254: R24.2 89.483,23.558 Q5.1
NetQ6_1: Q6.1 R26.2 R30.1 | length 9.5
  Top Layer w0.254: R26.2 106.68,9.398 Q6.1
  Bottom Layer w0.254: R30.1 105.791,10.287 R26.2
NetQ6_2: Q6.2 R25.2 | length 3.9
  Top Layer w0.254: R25.2 110.49,8.687 110.617,8.56 Q6.2
NetQ7_2: Q7.2 R26.1 | length 5.4
  Top Layer w0.254: Q7.2 106.426,20.701 106.68,20.447 R26.1
NetR5_2: R5.2 R11.1 | length 16.6
  Top Layer w0.254: R11.1 70.256,57.302 70.256,70.206 R5.2
NetR6_1: R6.1 U5.6 | length 8.7
  Top Layer w0.254: U5.6 124.092,83.426 124.092,78.473 R6.1
NetR7_2: R7.2 U4.6 | length 7
  Top Layer w0.254: R7.2 86.36,80.391 U4.6
NetR8_1: R8.1 U4.3 | length 9
  Top Layer w0.254: R8.1 87.757,65.024 87.757,70.104 U4.3
NetR10_1: R10.1 U5.5 | length 17
  Bottom Layer w0.254: R10.1 119.888,93.345 120.752,92.481 120.752,84.226 U5.5
NetR13_2: R13.2 U9.1 | length 5
  Bottom Layer w0.254: R13.2 87.295,8.844 89.2,8.844 U9.1
NetR14_1: R14.1 U4.5 | length 10.1
  Top Layer w0.254: U4.5 88.9,83.947 89.408,84.455 R14.1
NetR29_2: R29.2 U19.1 | length 8.3
  Top Layer w0.254: U19.1 118.11,19.558 118.491,19.177 R29.2
NetR35_2: R35.2 R39.1 U23.2 | length 26.1
  Top Layer w0.254: U23.2 62.535,8.433 69.393,8.433 R35.2 R39.1
NetR36_2: R36.2 R37.1 U23.6 | length 14.8
  Top Layer w0.254: R36.2 R37.1
  Bottom Layer w0.254: R36.2 45.085,13.335 U23.6
NetR37_2: R37.2 R42.3 | length 5.8
  Top Layer w0.254: R37.2 R42.3
NetR38_3: R38.3 R39.2 | length 5.8
  Top Layer w0.254: R39.2 R38.3
NetR40_2: R40.2 U23.1 | length 14.4
  Bottom Layer w0.254: U23.1 60.096,3.454 67.716,3.454 69.012,2.159 R40.2
NetR41_2: R41.2 U23.7 | length 28.3
  Top Layer w0.254: v1(39.751,14.249) 39.751,3.456 R41.2
  Bottom Layer w0.254: v1(39.751,14.249) 39.751,13.701 44.196,9.256 46.624,9.256 U23.7
NetR43_1: R43.1 U23.3 | length 10.1
  Bottom Layer w0.254: R43.1 56.312,8.077 57.963,8.077 U23.3
NetR44_2: R44.2 U23.5 | length 8.3
  Top Layer w0.254: U23.5 49.784,11.176 49.784,15.494 R44.2
NetU1_2: U1.2 U5.1 | length 17.9
  Top Layer w0.254: U5.1 119.126,85.852 119.126,74.803 U1.2
NetU12_1: U12.1 U14.5 | length 44.4
  Bottom Layer w0.254: U12.1@3.493,49.618 5.493,49.618 U12.1@7.493,49.618
  Bottom Layer w3: U12.1@7.493,49.618 18.454,49.618 27.484,40.588 38.905,40.588 41.258,38.235 41.258,37.193 U14.5
NetU12_2: U12.2 U13.5 | length 25.1
  Bottom Layer w0.254: U12.2@3.493,44.618 U12.2@5.493,44.618
  Bottom Layer w0.508: U12.2@5.493,44.618 U12.2@7.493,44.618
  Bottom Layer w3: U12.2@7.493,44.618 17.196,44.618 U13.5
NetU12_4: U12.4 U16.2 | length 67.1
  Bottom Layer w0.254: U12.4@3.493,34.618 U12.4@5.493,34.618
  Bottom Layer w0.508: U12.4@5.493,34.618 U12.4@7.493,34.618
  Bottom Layer w3: U12.4@7.493,34.618 15.762,34.618 21.069,29.311 21.144,29.311 21.915,28.54 29.81,28.54 32.004,30.734 53.72,30.734 57.895,34.909 57.895,37.506 59.652,39.263 U16.2
NetU13_2: U13.2 U14.4 | length 29.4
  Bottom Layer w3: U13.2 31.242,49.276 35.914,44.604 41.756,44.604 49.788,36.572 U14.4
NetU14_2: U14.2 U16.3 | length 17.3
  Bottom Layer w3: U14.2 47.879,50.012 52.485,45.406 61.06,45.406 U16.3
NTC: U18.3 U21.7 | length 13.7
  Top Layer w0.254: U18.3 129.014,92.329 132.258,89.085 132.258,84.919 U21.7
POWER_IN: Q2.2 Q3.2 U17.1 U21.9 | length 66.3
  Top Layer w0.254: U21.9 130.048,74.161 130.048,68.031 130.825,67.254 130.825,66.716 v1(134.041,63.5) ; Q2.2@134.159,52.378 Q2.2@135.077,51.46
  Bottom Layer w0.254: Q3.2 106.782,59.665 108.585,59.665 110.973,57.277 121.895,57.277 123.698,59.08 131.801,59.08 134.915,55.966 ; U17.1@132.915,47.561 134.915,47.561 U17.1@136.915,47.561
  Bottom Layer w3: U17.1@134.915,47.561 134.915,55.966
  other v2: 132.334,54.864 136.398,54.864 132.334,57.15 136.398,57.15 132.334,59.436 136.398,59.436
POWER_REG: Q3.3 R27.2 U18.1 | length 54.2
  Top Layer w0.254: R27.2 113.665,59.639 118.974,64.948 121.539,64.948 v1(124.917,68.326) ; U18.1 126.492,78.511 127.356,77.647 v1(127.356,70.206)
  Bottom Layer w0.254: Q3.3 103.911,54.966 112.801,54.966 R27.2 ; v1(124.917,68.326) 125.476,68.326 v1(127.356,70.206)
REG_C: C2.1 R15.1 U4.1 U5.3 | length 49.6
  Top Layer w0.254: C2.1 U4.1 ; v1(112.979,79.121) 112.979,82.753 U5.3
  Bottom Layer w0.254: U4.1 83.563,73.784 92.015,73.784 96.134,77.902 98.589,77.902 98.655,77.836 112.268,77.836 112.979,78.547 v1(112.979,79.121) ; R15.1 113.081,84.455 113.462,84.836 U5.3
REG_V: R17.1 U4.7 U5.2 | length 38.4
  Top Layer w0.254: U4.7 86.741,76.2 91.872,76.2 92.329,76.657 92.329,78.892 93.701,80.264 94.996,80.264 R17.1
  Bottom Layer w0.254: R17.1 102.108,87.376 U5.2
SAMPLE_C: R4.2 U18.2 U21.8 | length 82.9
  Top Layer w0.254: U18.2 129.54,89.789 130.226,89.103 130.226,84.411 U21.8 133.992,80.61 130.048,76.666 v1(130.048,76.632)
  Bottom Layer w0.254: R4.2 75.971,62.332 83.541,62.332 85.075,63.866 85.075,64.643 86.608,66.176 88.528,66.176 90.721,68.369 92.456,70.104 108.56,70.104 109.068,70.612 109.068,72.238 109.728,72.898 112.598,72.898 115.265,75.565 128.912,75.565 129.979,76.632 v1(130.048,76.632)
SAMPLE_V: R11.2 R14.2 R18.1 | length 40.4
  Top Layer w0.254: R11.2 67.564,65.024 67.564,83.058 R18.1
  Bottom Layer w0.254: R18.1 70.246,85.74 85.075,85.74 R14.2
SWITCH: U19.2 U21.3 | length 119.8
  Top Layer w0.254: v1(89.662,33.274) 89.662,47.114 102.616,60.068 v1(102.616,67.945) ; v1(114.554,69.85) 122.809,69.85 v1(123.444,70.485) ; v1(132.842,69.342) 132.842,69.291 135.204,66.929 136.652,66.929 139.192,69.469 139.192,72.905 U21.3
  Bottom Layer w0.254: v1(89.662,33.274) 92.964,29.972 113.919,29.972 U19.2 ; v1(102.616,67.945) 108.006,67.945 108.895,68.834 113.538,68.834 v1(114.554,69.85) ; v1(123.444,70.485) 124.435,71.476 130.657,71.476 132.791,69.342 v1(132.842,69.342)
SWITCH_L: R23.1 R25.1 U19.4 | length 9.3
  Top Layer w0.254: R25.1 U19.4
  Bottom Layer w0.254: R25.1 112.522,18.161 112.649,18.034 R23.1
T1: D8.1 D12.2 Q8.1 U13.3 | length 111.6
  Top Layer w0.254: D8.1 15.418,56.312 27.559,56.312 31.598,52.273 33.741,52.273 U13.3 39.143,50.673 43.561,50.673 45.212,49.022 45.212,24.841 v1(43.383,23.012) ; Q8.1 D12.2
  Bottom Layer w0.254: v1(43.383,23.012) 43.383,18.898 47.752,14.529 58.33,14.529 60.743,16.942 69.799,16.942 D12.2
T2: D9.1 D13.2 Q9.1 U14.3 | length 72.8
  Top Layer w0.254: Q9.1 D13.2 45.085,12.612 51.74,19.267 51.74,46.633 U14.3
  Bottom Layer w0.254: D9.1 32.436,53.416 49.235,53.416 U14.3
pads on no net: Q3.0 U2.0 U3.0 U5.7 U10.0 U11.0 U22.0

## Other copper
Bottom Layer:
  rectangle net POWER_IN: 129.667,50.419 139.573,63.881

## Silkscreen, mask and mechanical layers (free items; w line width, h text height)
Mechanical 15:
  circle w0.127: c110.617,6.731 r3.029
  circle w0.127: c106.426,23.241 r3.312
  circle w0.127: c83.312,4.445 r3.683
  circle w0.127: c76.2,3.429 r3.175
  circle w0.127: c45.085,3.429 r3.538
  circle w0.127: c61.595,70.358 r3.597
  circle w0.127: c137.5,2.5 r4
  circle w0.127: c137.5,93.5 r4
  circle w0.127: c2.5,2.5 r4
  circle w0.127: c2.5,93.5 r4

## Text inside footprints (layer, text, board x,y; h text height)
C3: Top Overlay "+" at 20.574,91.122 h1.5 r270
C4: Top Overlay "+" at 37.846,82.296 h1.5 r270
C5: Top Overlay "+" at 52.705,82.696 h1.5 r270
C7: Top Overlay "+" at 37.846,71.437 h1.5 r270
C8: Top Overlay "+" at 20.574,72.263 h1.5 r270
C11: Top Overlay "+" at 52.832,73.831 h1.5 r270
C14: Top Overlay "+" at 130.175,21.971 h1.5
C15: Top Overlay "+" at 98.933,48.447 h1.5 r270
C16: Top Overlay "+" at 118.491,48.447 h1.5 r270
C17: Top Overlay "+" at 79.375,48.447 h1.5 r270
C18: Top Overlay "+" at 55.88,20.066 h1.5 r90
C19: Top Overlay "+" at 19.84,6.731 h1.5
C20: Top Overlay "+" at 7.747,21.844 h1.5 r270
U16: Top Overlay "+" at 59.69,48.895 h1.52 r90; Top Overlay "~" at 60.452,43.815 h1.52 r90; Top Overlay "~" at 60.452,38.735 h1.52 r90; Top Overlay "-" at 59.944,33.655 h1.52 r90